# Altium PCB MB1280.PcbDoc
Units mil, origin at the board's own origin, x right, y up, seen from the top; angles counter-clockwise.
Board outline 2150 x 1780 mil, 2 copper layers (Top Layer, Bottom Layer), stack 61.855 mil thick; 26 components, 23 nets, 119 pads, 19 vias.
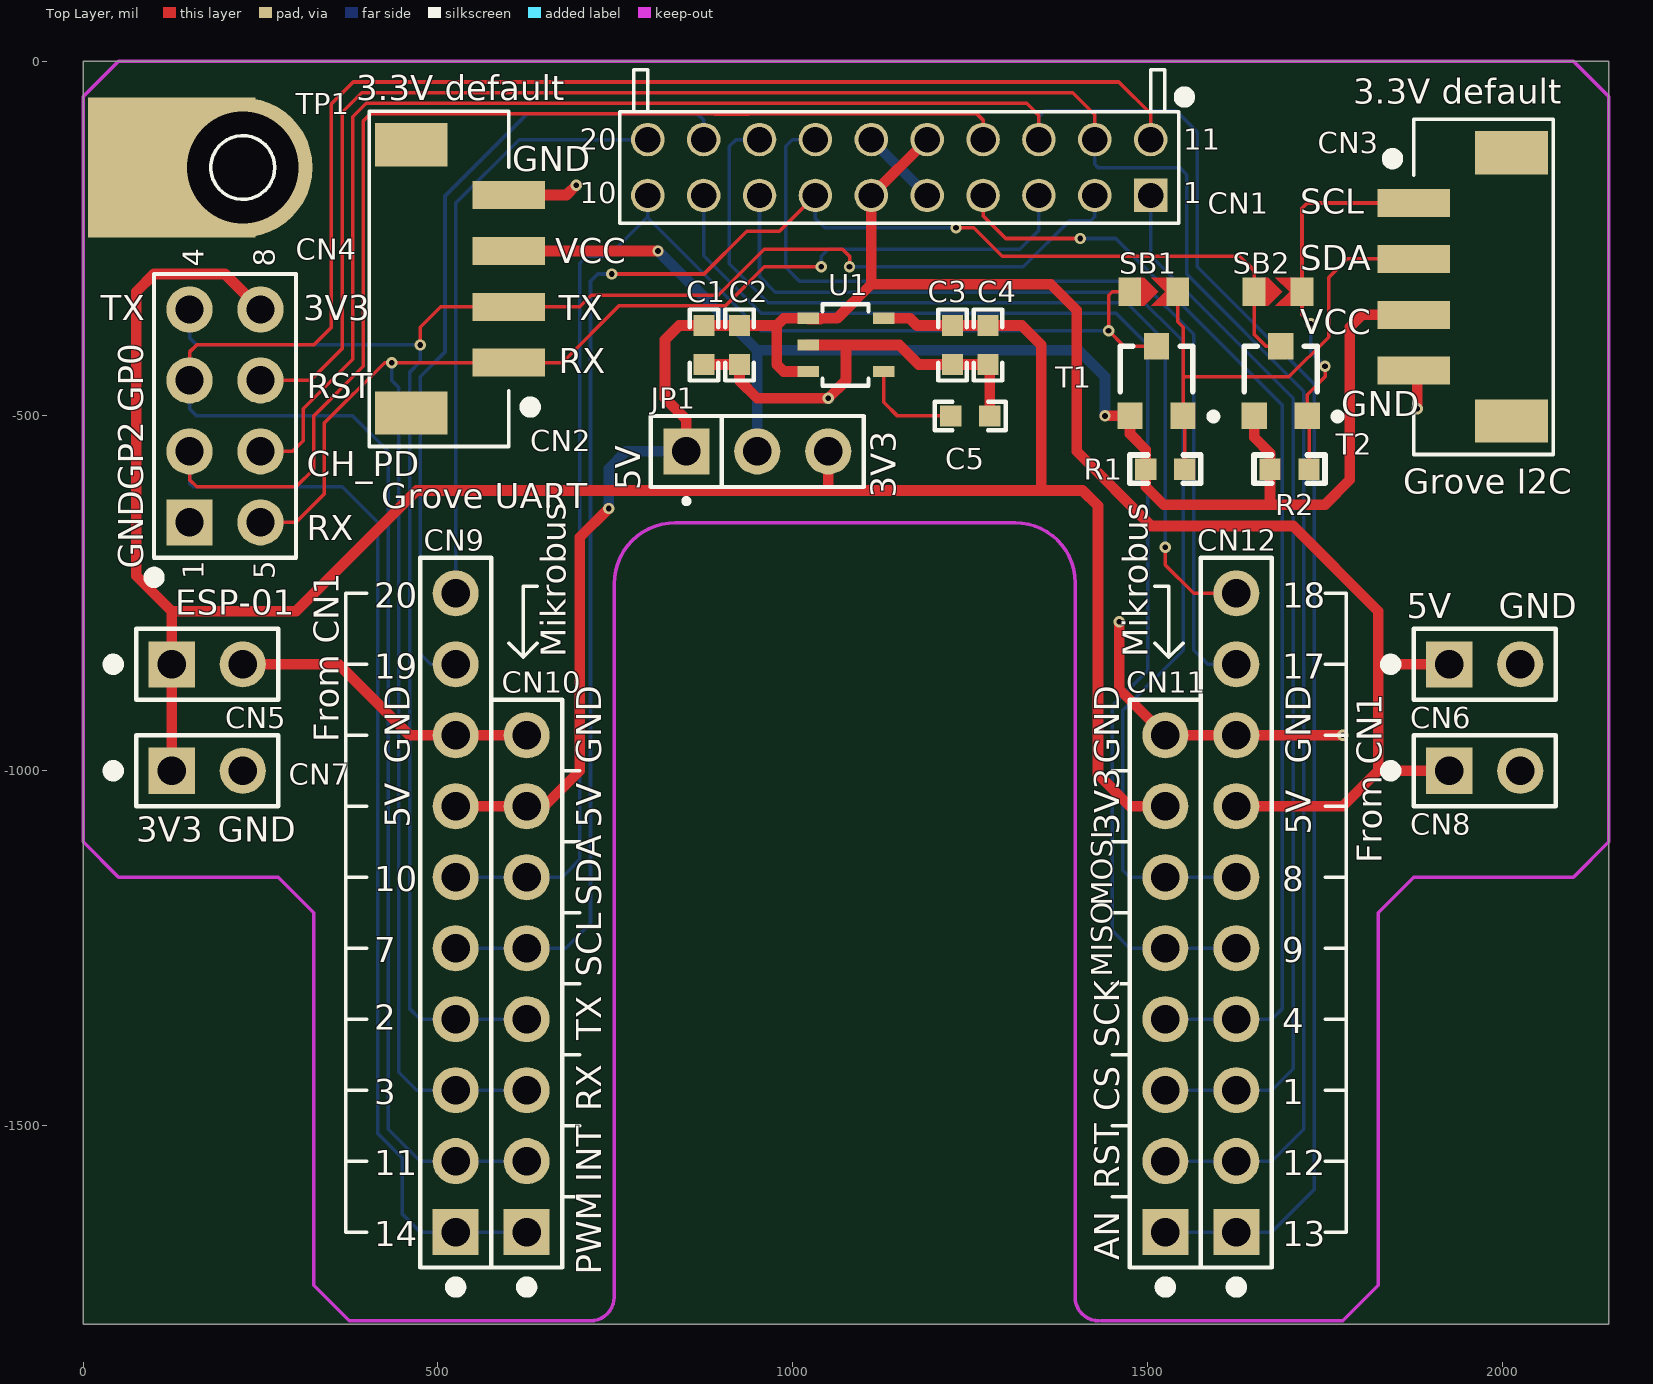
[diagram p0: Top Layer view]
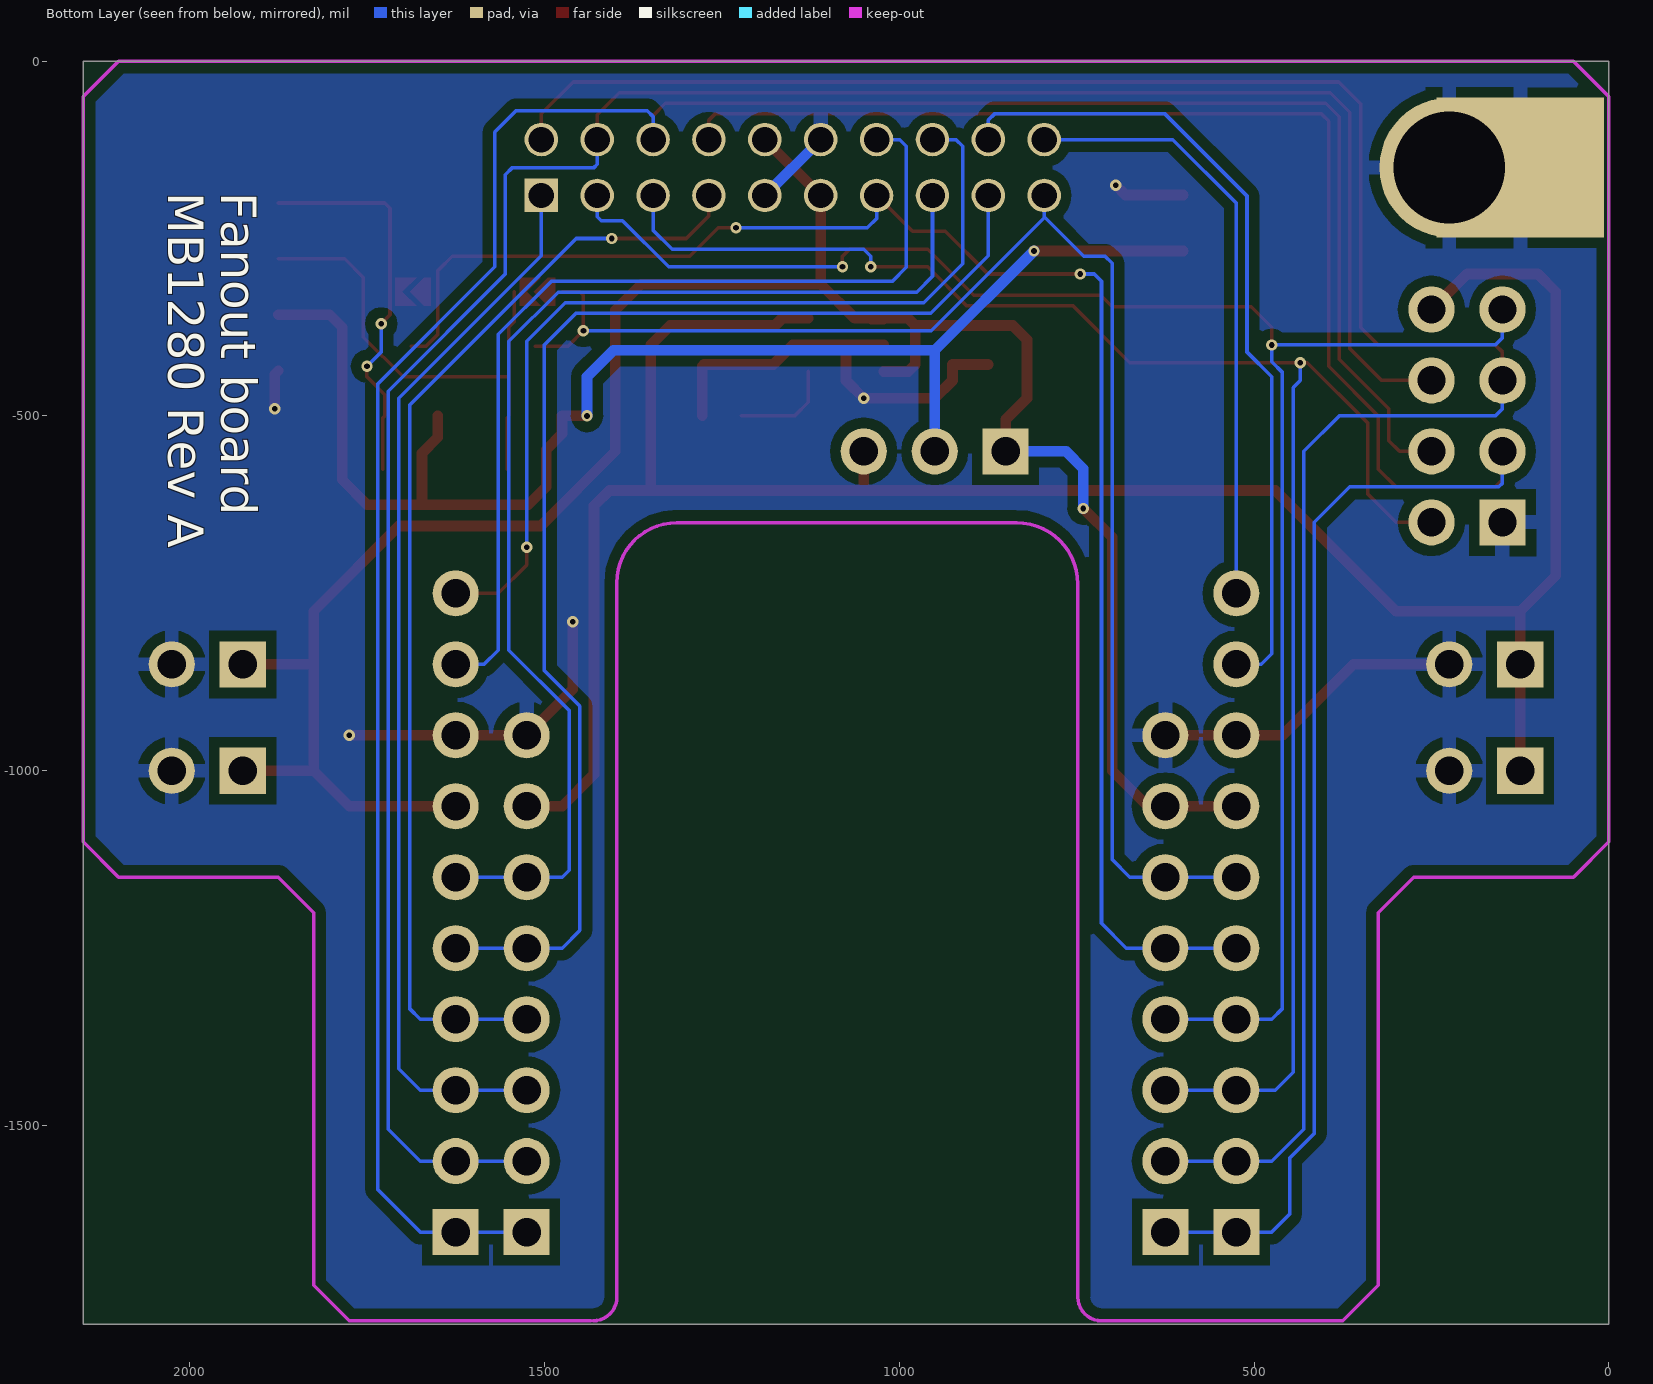
[diagram p1: Bottom Layer view, seen from below]

## Layer stack, top to bottom
Top Solder: solder mask 0.4, Solder Resist, Dk 3.5
Top Layer: signal copper 1.4
Dielectric1: core 59.0551, FR-4, Dk 4.8
Bottom Layer: signal copper 1.4
Bottom Solder: solder mask 0.4, Solder Resist, Dk 3.5

## Board outline
0,0 0,-1100 0,-1780 0,0 2150,0 2150,-1780 1290,-1780 0,-1780

## Design rules (kind name [scope] priority, off if disabled: settings)
Clearance Clearance_1 [(InPoly)] p1: gap=15 ignorepadtopadclearanceinfootprint=FALSE except(0: Arc-Hole Track-Hole SMDPad-Hole THPad-Hole Via-Hole Fill-Hole Poly-Hole Region-Hole Text-Hole)
Clearance Clearance_2 [(HasFootprint('SB_DIP')) or (HasFootprint('JP2_SMD')) or InNet('PC13')] p2: gap=5 ignorepadtopadclearanceinfootprint=FALSE except(0: Arc-Hole Track-Hole SMDPad-Hole THPad-Hole Via-Hole Fill-Hole Poly-Hole Region-Hole Text-Hole)
Clearance [All] p3: gap=10 ignorepadtopadclearanceinfootprint=FALSE except(0: Arc-Hole Track-Hole SMDPad-Hole THPad-Hole Via-Hole Fill-Hole Poly-Hole Region-Hole Text-Hole)
FabricationTestPointUsage TestPointUsage [All] p1: valid=0 allowmultiple=FALSE
FabricationTestpoint Testpoint [(IsPad And (OnTopLayer Or OnBottomLayer))] p1: side=3 testpointundercomponent=TRUE minsize=40 maxsize=100 preferedsize=60 minholesize=0 maxholesize=40 preferedholesize=32 testpointgrid=1 allowsidetop=TRUE allowsidebottom=TRUE usegrid=TRUE gridtolerance=0.01
HoleSize [All] p1: absolutevalues=TRUE maxlimit=150 minlimit=1 maxpercent=80.000 minpercent=20.000
PolygonConnect PolygonConnect_1 [IsVia] p1: connectstyle=Direct reliefconductorwidth=20 reliefentries=4 polygonreliefangle="90 Angle" airgapwidth=10
PolygonConnect [All] p2: connectstyle=Relief reliefconductorwidth=20 reliefentries=4 polygonreliefangle="90 Angle" airgapwidth=10
RoomDefinition MB1280_Fanout [InComponentClass('MB1280_Fanout')] p1: confinementstyle=ConfineIn formatcopy=TRUE lockcomponents=FALSE outline -2758.27,-3753.15 -758.27,-3753.15 -758.27,-2753.15 -2758.27,-2753.15
RoutingLayers [All] p1: top layer_v5=FALSE bottom layer_v5=FALSE
RoutingVias [All] p1: holewidth=13 width=25 viastyle="Through Hole" minholewidth=8 minwidth=16 maxholewidth=28 maxwidth=50
SilkToSolderMaskClearance SilkscreenOverComponentPads [IsPad] p1: minsilkscreentomaskgap=10 clearancetoexposedcopper=TRUE
SolderMaskExpansion [All] p1: expansion=4
Width Width_1 [InNet('VDD_MCU')] p1: maxlimit=100 minlimit=6 preferedwidth=12
Width [All] p2: maxlimit=100 minlimit=5 preferedwidth=5 minimp=50.000000 maximp=50.000000 favimp=50.000000
25 further rules are at their usual default settings.

## Components (designator, comment, footprint, x,y, rotation, side; value= is the part's Value field where it differs from the comment)
C1 "100nF" 0603C 875,-400 r270 top
C2 "1uF_X5R_0603" 0603C 925,-400 r270 top value=1µF
C3 "1uF_X5R_0603" 0603C 1225,-400 r90 top value=1µF
C4 "100nF" 0603C 1275,-400 r270 top
C5 "10nF_X7R_0603" 0603C 1250,-500 r0 top value=10NF
CN1 "TMM-110-01-L-D-RA" 2*10_MALE_2MM_H 1150,-150 r0 top
CN2 "1125S-SMT-4P" 1X4_MALE_C 600,-425 r270 top
CN3 "1125S-SMT-4P" 1X4_MALE_C 1875,-200 r90 top
CN4 "Header 4X2A" HDR2X4_CEN1 150,-650 r90 top
CN5 "PAD 2" HDR_2X1_2R54 125,-850 r0 top
CN6 "PAD 2" HDR_2X1_2R54 1925,-850 r0 top
CN7 "PAD 2" HDR_2X1_2R54 125,-1000 r0 top
CN8 "PAD 2" HDR_2X1_2R54 1925,-1000 r0 top
CN9 "PAD 1X8" 1*10P_FEMALE 525,-1650 r90 top
CN10 "Header 8X1_Female" 1*8P_FEMALE 625,-1650 r90 top
CN11 "Header 8X1_Female" 1*8P_FEMALE 1525,-1650 r90 top
CN12 "PAD 1X8" 1*10P_FEMALE 1625,-1650 r90 top
JP1 "" SIP3 850,-550 r0 top
R1 "4K7[N/A]" 0603R 1525,-575 r0 top value=1K
R2 "4K7[N/A]" 0603R 1700,-575 r0 top value=1K
SB1 "Closed" SB_0603 1475,-325 r180 top
SB2 "Closed" SB_0603 1650,-325 r180 top
T1 "BSN20[N/A]" SOT23-213 1550,-500 r0 top
T2 "BSN20[N/A]" SOT23-213 1725,-500 r0 top
TP1 "Ground" TP_C4MM_PAD 225,-150 r0 top
U1 "LDK120M33R" SOT-23-5L 1075,-400 r0 top

## Footprints (in the part's own frame and the unit in brackets; to place one, negate y for a bottom-side part, rotate by r counter-clockwise, add the part's x,y. Pads: shape width x height; smd on the part's side, far side on the other; paste and mask are expansions set on the pad)
1*8P_FEMALE [mil]
  rect 65x65 hole 40: 1(0,0)
  round 65 hole 40: 2(100,0) 3(200,0) 4(300,0) 5(400,0) 6(500,0) 7(600,0) 8(700,0)
  silkscreen extent -85,-50 750,50
1*10P_FEMALE [mil]
  rect 65x65 hole 40: 1(0,0)
  round 65 hole 40: 2(100,0) 3(200,0) 4(300,0) 5(400,0) 6(500,0) 7(600,0) 8(700,0) 9(800,0) 10(900,0)
  silkscreen extent -85,-50 950,50
1X4_MALE_C [mm] "Connector; Header; 4 Position"
  rect 1.55x2.6 smd: 0(-7.8,-3.5) 0(1.8,-3.5)
  rect 1x2.6 smd: 1(0,0) 2(-2,0) 3(-4,0) 4(-6,0)
  silkscreen extent -9,-5 3,0.95
2*10_MALE_2MM_H [mm]
  rect 1.2x1.2 hole 0.91: 1(9,-1)
  round 1.2 hole 0.91: 2(7,-1) 3(5,-1) 4(3,-1) 5(1,-1) 6(-1,-1) 7(-3,-1) 8(-5,-1) 9(-7,-1) 10(-9,-1) 11(9,1) 12(7,1) 13(5,1) 14(3,1) 15(1,1) 16(-1,1) 17(-3,1) 18(-5,1) 19(-7,1) 20(-9,1)
  silkscreen extent -10,-2 10.4,3.5
0603C [mil]
  rect 30x30 smd: 1(27.5,0) 2(-27.5,0)
  silkscreen extent -50,-20 50,20
0603R [mil]
  rect 30x30 smd: 1(27.5,0) 2(-27.5,0)
  silkscreen extent -50,-20 50,20
HDR2X4_CEN1 [mil] "Connector; Header; 4x2 Position"
  rect 65x65 hole 40: 1(0,0)
  round 65 hole 40: 2(100,0) 3(200,0) 4(300,0) 5(0,-100) 6(100,-100) 7(200,-100) 8(300,-100)
  silkscreen extent -85,-150 350,57
HDR_2X1_2R54 [mil]
  rect 65x65 hole 40: 1(0,0)
  round 65 hole 40: 2(100,0)
  silkscreen extent -90,-50 150,50
SB_0603 [mil]
  rect 32x40 smd: 1(0,0) 2(-67.5,0)
  Top Layer region: -10,20 -20,20 -40,0 -20,-20 -10,-20
  Top Layer region: -60,0 -50,0 -30,20 -60,20
  Top Layer region: -60,0 -50,0 -30,-20 -60,-20
SIP3 [mil]
  rect 65x65 hole 40: 1(0,0)
  round 65 hole 40: 2(100,0) 3(200,0)
  silkscreen extent -50,-72 250,50
SOT23-213 [mm]
  rect 0.9x0.95 smd: 1(0,0) 2(-1.9,0) 3(-0.95,2.5)
  silkscreen extent -2.25,-0.14 1.21,2.5
SOT-23-5L [mil]
  rect 30x16 smd: 1(-53.15,37.4) 2(-53.15,0) 3(-53.15,-37.4) 4(53.15,-37.4) 5(53.15,37.4)
  silkscreen extent -33,-58 32,57
TP_C4MM_PAD [mm]
  rect 6x5 smd: 1(-2.54,0)
  rect 6x5 smd far side: 1(-2.54,0)
  round 5 hole 4: 1(0,0)
  silkscreen extent -1.14,-1.14 1.14,1.14

## Part data
C1 C4: library part Capacitor_ST, "Capacitor 0402 / 0603 / 0805", Revision="July-2002: Re-released for DXP Platform."
C2 C3: library part "CAP SMD 0603  X5R 1µF 25V 10%", "0603  X5R 1µF", Rated voltage=25V, Temperature Max=+125°C, Temperature Min=-55°C, Tolerance=10%, Order code Farnell=1288202RL, Technology=X5R
C5: library part "CAP SMD 0603  X7R 10000PF 50V 10%", "0603  X7R 10NF", Rated voltage=50V, Temperature Max=+125°C, Temperature Min=-55°C, Tolerance=10%, Order code Farnell=7569548RL, Order code RS=2040779, Technology=X7R
CN1: library part "Header 10X2A", "Header, 10-Pin, Dual row", LatestRevisionDate=17-Jul-2002, LatestRevisionNote="Re-released for DXP Platform.", Publisher="Altium Limited"
CN2 CN3: library part "Header 4", LatestRevisionDate=17-Jul-2002, LatestRevisionNote="Re-released for DXP Platform.", Publisher="Altium Limited"
CN4: "Header, 4-Pin, Dual row", LatestRevisionDate=17-Jul-2002, LatestRevisionNote="Re-released for DXP Platform.", Publisher="Altium Limited"
CN5 CN6 CN7 CN8: library part "Header 2", "Header, 2-Pin", LatestRevisionDate=17-Jul-2002, LatestRevisionNote="Re-released for DXP Platform.", Publisher="Altium Limited"
CN9 CN12: library part "Header 10X1_Female", "Header, 10-Pin, Single row,female", ECCN_US/EU=NA, LatestRevisionDate=17-Jul-2002, LatestRevisionNote="Re-released for DXP Platform.", Ordered by=Subcon, Publisher="Altium Limited"
CN10 CN11: "Header, 8-Pin, Single row,female", ECCN_US/EU=NA, LatestRevisionDate=17-Jul-2002, LatestRevisionNote="Re-released for DXP Platform.", Ordered by=Subcon, Publisher="Altium Limited"
JP1: library part Jumper3
R1 R2: library part res1, "Resistor", Published=8-Jun-2000, Publisher="Altium Limited", Revision="July-2002: Re-released for DXP Platform."
SB1 SB2: library part "Circuit Breaker", "Circuit Breaker", Comments="Solder bridge", ECCN_US/EU=NA, Ordered by=Subcon, Published=24-Mar-1999, Publisher="Altium Limited", Revision="July-2002: Re-released for DXP Platform."
T1 T2: library part 2N7000
TP1: library part TP
U1: "200 mA low quiescent current very low noise LDO", Manuf_1=STM, Distrib=ST, ECCN_US/EU=EAR99/NEC, Manuf_Part_1=LDK120M33R, Order=LDK120M33R, Provided=ST, Ref St=9176161

## Via types
v1: diameter 16, hole 8, Top Layer to Bottom Layer, tented both sides, 19 vias

## Nets (pads, with @x,y where several pads share a name; then routed paths per layer and width w, separated by ;. In a path a pad name is that pad's centre, name@x,y a point inside that pad or via, vN(x,y) a via of type N, cw(c..) or ccw(c..) an arc to the next point about the centre after c; other vN are vias at no path point)
+3V3: C3.1 C4.2 CN4.8 CN5.1 CN7.1 CN11.7 JP1.3 U1.5 | length 3275.5
  Top Layer w15: CN7.1 CN5.1 125,-775 ; CN4.8 200,-300 100,-300 75,-325 75,-725 125,-775 ; JP1.3 1050,-605 ; U1.5 1165.1,-362.6 1175,-372.5 C3.1 C4.2 1322.5,-372.5 1350,-400 1350,-605 ; CN11.7 1475,-1050 1430,-1005 1430,-626.72 1408.28,-605 1350,-605 ; 125,-775 300,-775 470,-605 1050,-605 ; 1050,-605 1350,-605
+5V: C1.2 C2.2 CN1.6 CN1.15 CN6.1 CN8.1 CN9.7 CN10.7 CN12.7 JP1.1 U1.1 U1.3 | length 3257.3
  Top Layer w15: CN9.7 CN10.7 650,-1050 700,-1000 700,-700 700,-671.01 v1(740.51,-630.5) ; JP1.1 850,-505 820,-475 820,-392.5 840,-372.5 C1.2 C2.2 977.5,-372.5 ; U1.3 987.4,-437.4 977.5,-427.5 977.5,-372.5 ; U1.1 987.4,-362.6 977.5,-372.5 ; U1.1@1022.66,-363.41 1038.64,-363.41 1039.45,-362.6 1062.4,-362.6 1110.63,-314.37 ; CN1.15 CN1.6 1110.63,-314.37 ; CN12.7 1775,-1050 1825,-1000 ; CN8.1 1825,-1000 ; CN6.1 1825,-850 ; 1110.63,-314.37 1363.31,-314.37 1400,-351.06 1400,-550 1505,-655 1705,-655 1825,-775 1825,-850 ; 1825,-1000 1825,-850
  Bottom Layer w15: v1(740.51,-630.5) 740.51,-574.49 765,-550 821.01,-550 JP1.1
GND: C1.1 C2.1 C3.2 C4.1 C5.1 CN1.5 CN1.16 CN2.4 CN3.4 CN4.1 CN5.2 CN6.2 CN7.2 CN8.2 CN9.8 CN10.8 CN11.8 CN12.8 TP1.1 U1.2 | length 1777.5
  Top Layer w15: CN5.2 360,-850 460,-950 CN9.8 CN10.8 ; CN2.4 681.22,-188.78 v1(695,-175) ; C1.1 C2.1 925,-450 950,-475 v1(1050,-475) 1075,-450 1075,-400 ; U1.2 1075,-400 ; C5.1 1277.5,-430 C4.1 C3.2 1177.5,-427.5 1150,-400 1075,-400 ; v1(1460,-790) 1460,-885 CN11.8 CN12.8 v1(1775,-950) ; CN3.4 1880,-441.22 v1(1880,-490)
  Bottom Layer w15: CN1.16 CN1.5
I2C_SCL: CN3.1 R2.1 SB2.2 T2.1 | length 553
  Top Layer w5: R2.1 1727.5,-502.5 T2.1 1725,-470 1750,-445 v1(1750,-430) ; v1(1730,-370) 1717.5,-357.5 SB2.2 1717.5,-207.5 1725,-200 CN3.1
  Bottom Layer w5: v1(1730,-370) 1730,-410 v1(1750,-430)
I2C_SDA: CN3.2 R1.1 SB1.2 T1.1 | length 697.2
  Top Layer w5: SB1.2 1542.5,-367.5 1550,-375 1550,-445 ; R1.1 1552.5,-502.5 T1.1 1550,-445 ; CN3.2 1781.26,-278.74 1755,-305 1755,-388.94 1698.94,-445 1550,-445
NetC5_2: C5.2 U1.4 | length 145.6
  Top Layer w5: U1.4 1128.15,-480.65 1147.5,-500 C5.2
STMOD#1: CN1.1 CN11.3 CN12.3 | length 1506.2
  Bottom Layer w5: CN1.1 1504.33,-274.33 1705,-475 1705,-1420 1675,-1450 CN12.3 CN11.3
STMOD#2: CN1.2 CN2.2 CN4.4 CN9.4 CN10.4 | length 2581.1
  Top Layer w5: v1(475,-400) 475,-375 503.74,-346.26 CN2.2 700,-346.26 716.26,-330 895,-330 960,-265 1070,-265 1080,-275 v1(1080,-290)
  Bottom Layer w5: CN4.4 150,-390 160,-400 v1(475,-400) 475,-423.79 460,-438.79 460,-1335 475,-1350 CN9.4 CN10.4 ; v1(1080,-290) 1324.96,-290 1389.96,-225 1420,-225 1425.59,-219.41 CN1.2
STMOD#3: CN1.3 CN2.1 CN4.5 CN9.3 CN10.3 | length 2578.1
  Top Layer w5: CN4.5 300,-650 340,-610 340,-510 425,-425 v1(435,-425) CN2.1 675,-425 755,-345 905,-345 960,-290 v1(1040,-290)
  Bottom Layer w5: v1(435,-425) 435,-450 445,-460 445,-1425 470,-1450 CN9.3 CN10.3 ; v1(1040,-290) 1040,-275 1050,-265 1320,-265 1346.85,-238.15 CN1.3
STMOD#4: CN1.4 CN11.4 CN12.4 | length 1582.4
  Top Layer w5: CN1.4 1268.11,-218.11 1300,-250 v1(1405,-250)
  Bottom Layer w5: v1(1405,-250) 1455,-250 1690,-485 1690,-1335 1675,-1350 CN12.4 CN11.4
STMOD#7: CN1.7 CN9.5 CN10.5 SB2.1 T2.3 | length 2291.7
  Top Layer w5: v1(745,-300) 875,-300 935,-240 981.26,-240 CN1.7 ; v1(1230,-235) 1255,-235 1295,-275 1630,-275 1650,-295 SB2.1 1650,-385 1666.58,-401.58 T2.3
  Bottom Layer w5: CN9.5 CN10.5 680,-1250 715,-1215 715,-310 725,-300 v1(745,-300) ; CN1.7 1031.89,-221.89 1045,-235 v1(1230,-235)
STMOD#8: CN1.8 CN11.6 CN12.6 | length 1693
  Bottom Layer w5: CN1.8 953.15,-303.15 975.5,-325.5 1480.5,-325.5 1550,-395 1550,-830 1465,-915 1465,-1140 1475,-1150 CN11.6 CN12.6
STMOD#9: CN1.9 CN11.5 CN12.5 | length 1793.7
  Bottom Layer w5: CN1.9 874.41,-274.41 955.5,-355.5 1455.5,-355.5 1500,-400 1500,-858.79 1450,-908.79 1450,-1225 1475,-1250 CN11.5 CN12.5
STMOD#10: CN1.10 CN9.6 CN10.6 SB1.1 T1.3 | length 2052.9
  Top Layer w5: SB1.1 1450,-325 1445,-330 v1(1445,-380) 1466.58,-401.58 T1.3
  Bottom Layer w5: CN9.6 CN10.6 675,-1150 700,-1125 700,-285.04 710.04,-275 740,-275 794.33,-220.67 795.67,-220.67 ; CN1.10 795.67,-220.67 ; v1(1445,-380) 955,-380 795.67,-220.67
STMOD#11: CN1.11 CN4.3 CN9.2 CN10.2 | length 3304.8
  Top Layer w5: CN4.3 150,-410 160,-400 325,-400 350,-375 350,-60 380.49,-29.51 1459.51,-29.51 1504.33,-74.33 CN1.11
  Bottom Layer w5: CN4.3 150,-490 160,-500 380,-500 430,-550 430,-1505 475,-1550 CN9.2 CN10.2
STMOD#12: CN1.12 CN4.7 CN11.2 CN12.2 | length 3383.8
  Top Layer w5: CN4.7 320,-450 365,-405 365,-72.08 392.57,-44.51 1394.51,-44.51 1425.59,-75.59 CN1.12
  Bottom Layer w5: CN1.12 1425.59,-145.59 1430,-150 1545,-150 1555,-160 1555,-300 1720,-465 1720,-1505 1675,-1550 CN12.2 CN11.2
STMOD#13: CN1.13 CN4.6 CN11.1 CN12.1 | length 3632.1
  Top Layer w5: CN4.6 295,-550 310,-535 310,-490 380,-420 380,-78.29 398.79,-59.51 1329.51,-59.51 1346.85,-76.85 CN1.13
  Bottom Layer w5: CN1.13 1346.85,-78.15 1355,-70 1540,-70 1570,-100 1570,-290 1735,-455 1735,-1590 1675,-1650 CN12.1 CN11.1
STMOD#14: CN1.14 CN4.2 CN9.1 CN10.1 | length 3165.4
  Top Layer w5: CN4.2 150,-590 160,-600 300,-600 325,-575 325,-500 395,-430 395,-84.51 405,-74.51 889.37,-74.51 889.86,-75 937.7,-75 938.19,-74.51 1259.51,-74.51 1268.11,-83.11 CN1.14
  Bottom Layer w5: CN4.2 150,-595 155,-600 365,-600 415,-650 415,-1511.21 450,-1546.21 450,-1625 475,-1650 CN9.1 CN10.1
STMOD#17: CN1.17 CN12.9 | length 1343.7
  Bottom Layer w5: CN1.17 999.37,-110.63 990,-120 990,-290.5 1010,-310.5 1490.5,-310.5 1565,-385 1565,-830 1585,-850 CN12.9
STMOD#18: CN1.18 CN12.10 | length 1303.4
  Top Layer w5: v1(1525,-685) 1525,-710 1565,-750 CN12.10
  Bottom Layer w5: CN1.18 919.9,-110.63 910.53,-120 910.53,-285.53 965.5,-340.5 1470.5,-340.5 1525,-395 v1(1525,-685)
STMOD#19: CN1.19 CN9.9 | length 1159.1
  Bottom Layer w5: CN9.9 490,-850 475,-835 475,-445 510,-410 510,-190 625.49,-74.51 865.83,-74.51 874.41,-83.08 CN1.19
STMOD#20: CN1.20 CN9.10 | length 857.7
  Bottom Layer w5: CN9.10 525,-200 614.37,-110.63 CN1.20
VCC: CN2.3 CN3.3 JP1.2 R1.2 R2.2 T1.2 T2.2 | length 2011.8
  Top Layer w15: CN2.3 v1(810,-267.52) ; v1(1440,-500) T1.2 1475.2,-525.2 1497.5,-547.5 R1.2 1497.5,-600 1522.5,-625 1750,-625 1785,-590 1785,-375 1802.52,-357.48 CN3.3 ; T2.2 1650.2,-530.2 1672.5,-552.5 R2.2 1672.5,-622.5
  Bottom Layer w15: v1(810,-267.52) 950,-407.52 ; JP1.2 950,-407.52 ; v1(1440,-500) 1440,-445 1402.52,-407.52 950,-407.52
pads on no net: CN2.0 CN3.0

## Polygon pours and split planes (outlines as drawn)
GND on Bottom Layer "Bottom Layer-No Net" (solid, remove dead copper, pour order 4): 10,-10 10,-1785 1625,-1785 2230,-1785 2160,-1715 2160,-1085 2160,-10 15,-10

## Keep-outs
Keep-Out Layer:
  lines w5: 1431.25,-1775 cw(c1431.25,-1741.68) 1397.93,-1741.68 1397.93,-1280.32 1397.93,-734.98 ccw(c1313.34,-734.98) 1313.34,-650.39 834.72,-650.39 ccw(c834.72,-736.79) 748.32,-736.79 748.32,-1280.32 748.32,-1741.68 cw(c715,-1741.68) 715,-1775 375,-1775 325,-1725 325,-1200 275,-1150 50,-1150 0,-1100 0,-50 50,0 2100,0 2150,-50 2150,-1100 2100,-1150 1875,-1150 1825,-1200 1825,-1725 1775,-1775 1435,-1775

## Silkscreen, mask and mechanical layers (free items; w line width, h text height)
Top Overlay:
  lines w5: 370,-1550 400,-1550 ; 370,-1450 400,-1450 ; 370,-1350 400,-1350 ; 370,-1250 400,-1250 ; 370,-1150 400,-1150 ; 370,-1050 400,-1050 ; 370,-950 400,-950 ; 370,-850 400,-850 ; 400,-1650 370,-1650 370,-750 400,-750 ; 600,-820 620,-840 ; 640,-820 620,-840 ; 640,-740 620,-740 620,-840 ; 675,-1600 700,-1600 ; 675,-1500 700,-1500 ; 675,-1400 700,-1400 ; 675,-1300 700,-1300 ; 675,-1200 700,-1200 ; 675,-1100 700,-1100 ; 675,-1000 700,-1000 ; 1450,-1600 1475,-1600 ; 1450,-1500 1475,-1500 ; 1450,-1400 1475,-1400 ; 1450,-1300 1475,-1300 ; 1450,-1200 1475,-1200 ; 1450,-1100 1475,-1100 ; 1450,-1000 1475,-1000 ; 1510,-820 1530,-840 ; 1510,-740 1530,-740 1530,-840 ; 1550,-820 1530,-840 ; 1750,-1650 1780,-1650 1780,-750 1750,-750 ; 1750,-1550 1780,-1550 ; 1750,-1450 1780,-1450 ; 1750,-1350 1780,-1350 ; 1750,-1250 1780,-1250 ; 1750,-1150 1780,-1150 ; 1750,-1050 1780,-1050 ; 1750,-950 1780,-950 ; 1750,-850 1780,-850
  text "3.3V default" at 385,-55 h35
  text "3.3V default" at 1790,-60 h35
  text "GND" at 605,-155 h35
  text "SCL" at 1715,-215 h35
  text "VCC" at 665,-285 h35
  text "SDA" at 1715,-295 h35
  text "TX" at 25,-365 h35
  text "3V3" at 310,-365 h35
  text "TX" at 670,-365 h35
  text "VCC" at 1715,-385 h35
  text "RX" at 670,-440 h35
  text "RST" at 315,-475 h35
  text "GP0" at 85,-495 h35 r90
  text "GND" at 1772.6,-500.79 h35
  text "CH_PD" at 315,-585 h35
  text "GP2" at 85,-605 h35 r90
  text "5V" at 785,-605 h35 r90
  text "Grove I2C" at 1860,-610 h35
  text "3V3" at 1145,-615 h35 r90
  text "Grove UART" at 420,-630 h35
  text "RX" at 315,-675 h35
  text "GND" at 85,-715 h35 r90
  text "20" at 410,-770 h35
  text "18" at 1690,-770 h35
  text "ESP-01" at 130,-780 h35
  text "5V" at 1865,-785 h35
  text "GND" at 1995,-785 h35
  text "Mikrobus" at 680,-840 h35 r90
  text "Mikrobus" at 1500,-840 h35 r90
  text "19" at 410,-870 h35
  text "17" at 1690,-870 h35
  text "From CN1" at 360,-960 h35 r90
  text "GND" at 460,-990 h35 r90
  text "GND" at 730,-990 h35 r90
  text "GND" at 1460,-990 h35 r90
  text "GND" at 1730,-990 h35 r90
  text "5V" at 460,-1080 h35 r90
  text "5V" at 730,-1080 h35 r90
  text "3V3" at 1460,-1090 h35 r90
  text "5V" at 1730,-1090 h35 r90
  text "3V3" at 75,-1100 h35
  text "GND" at 190,-1100 h35
  text "From CN1" at 1830,-1130 h35 r90
  text "10" at 410,-1170 h35
  text "8" at 1690,-1170 h35
  text "SDA" at 730,-1190 h35 r90
  text "MOSI" at 1450,-1190 h30 r90
  text "7" at 410,-1270 h35
  text "9" at 1690,-1270 h35
  text "SCL" at 730,-1290 h35 r90
  text "MISO" at 1450,-1290 h30 r90
  text "2" at 410,-1365 h35
  text "4" at 1690,-1370 h35
  text "TX" at 730,-1380 h35 r90
  text "SCK" at 1460,-1390 h35 r90
  text "3" at 410,-1470 h35
  text "1" at 1690,-1470 h35
  text "RX" at 730,-1480 h35 r90
  text "CS" at 1460,-1480 h35 r90
  text "11" at 410,-1570 h35
  text "12" at 1690,-1570 h35
  text "INT" at 730,-1580 h35 r90
  text "RST" at 1460,-1590 h35 r90
  text "14" at 410,-1670 h35
  text "13" at 1690,-1670 h35
  text "AN" at 1460,-1690 h35 r90
  text "PWM" at 730,-1710 h35 r90
Bottom Overlay:
  text "Fanout board" at 1955,-185 h50 r90
  text "MB1280 Rev A" at 2030,-185 h50 r90
Mechanical 1:
  lines w5: 749.41,-1280.32 749.41,-1741.68 cw(c716.09,-1741.68) 716.09,-1775 375,-1775 325,-1725 325,-1200 275,-1150 50,-1150 0,-1100 0,-50 50,0 2100,0 2150,-50 2150,-1100 2100,-1150 1875,-1150 1825,-1200 1825,-1725 1775,-1775 1432.34,-1775 cw(c1432.34,-1741.68) 1399.02,-1741.68 1399.02,-1280.32 ; 749.41,-1278.94 cw(c769.09,-1278.94) 788.78,-1278.94 ; 788.78,-1280.32 788.78,-1741.68 ccw(c822.1,-1741.68) 822.1,-1775 1326.32,-1775 ccw(c1326.32,-1741.68) 1359.65,-1741.68 1359.65,-1280.32 ; 1359.65,-1278.94 cw(c1379.33,-1278.94) 1399.02,-1278.94 ; 749.41,-1150.39 ccw(c769.09,-1150.39) 788.78,-1150.39 788.78,-728.74 cw(c835.63,-728.74) 835.63,-681.89 1312.8,-681.89 cw(c1312.8,-728.74) 1359.65,-728.74 1359.65,-1150.39 ccw(c1379.33,-1150.39) 1399.02,-1150.39 1399.02,-734.98 ccw(c1314.43,-734.98) 1314.43,-650.39 835.8,-650.39 ccw(c835.8,-736.79) 749.41,-736.79 749.41,-1150.39
  text "MB1280" at 120,145 h60
Drill Drawing:
  lines w1: 2455,-1482.83 2875,-1482.83 ; 2455,-1469.53 2875,-1469.53 ; 2395,-1546 ccw(c2399,-1546) 2399,-1550 2931,-1550 ccw(c2931,-1546) 2935,-1546 2935,-1454 ccw(c2931,-1454) 2931,-1450 2399,-1450 ccw(c2399,-1454) 2395,-1454 2395,-1546
  text ".legend" at 2475,-360 h40
  text "Layer Stack Up Detail for: MB1280.PcbDoc" at 2455,-1464.87 h7
  text "Layer" at 2455,-1474.53 h3
  text "Gerber" at 2542.98,-1474.53 h3
  text "Copper" at 2594.57,-1474.53 h3
  text "Dielectric" at 2651.06,-1474.53 h3
  text "Dielectric" at 2709.64,-1474.53 h3
  text "Dielectric" at 2777.63,-1474.53 h3
  text "Dielectric" at 2836.22,-1474.53 h3
  text "Name" at 2455,-1480.53 h3
  text "Document" at 2542.98,-1480.53 h3
  text "Thickness" at 2594.57,-1480.53 h3
  text "Height" at 2651.06,-1480.53 h3
  text "Material" at 2709.64,-1480.53 h3
  text "Constant" at 2777.63,-1480.53 h3
  text "Type" at 2836.22,-1480.53 h3
  text "Top Solder Mask" at 2455,-1489.58 h4
  text "(.GTS)" at 2542.98,-1489.58 h4
  text "0.4mil" at 2651.06,-1489.58 h4
  text "Solder Resist" at 2709.64,-1489.58 h4
  text "3.50" at 2777.63,-1489.58 h4
  text "Top Layer" at 2455,-1502.08 h4
  text "(.GTL)" at 2542.98,-1502.08 h4
  text "1.4mil" at 2594.57,-1502.08 h4
  text "59.055mil" at 2651.06,-1508.33 h4
  text "FR-4" at 2709.64,-1508.33 h4
  text "4.80" at 2777.63,-1508.33 h4
  text "Core" at 2836.22,-1508.33 h4
  text "Bottom Layer" at 2455,-1514.58 h4
  text "(.GBL)" at 2542.98,-1514.58 h4
  text "1.4mil" at 2594.57,-1514.58 h4
  text "Bottom Solder Mask" at 2455,-1527.08 h4
  text "(.GBS)" at 2542.98,-1527.08 h4
  text "0.4mil" at 2651.06,-1527.08 h4
  text "Solder Resist" at 2709.64,-1527.08 h4
  text "3.50" at 2777.63,-1527.08 h4

## Dimensions
749.41,-1741.68 to 1399.02,-1741.68 on Drill Drawing
325,-1725 to 1825,-1725 on Drill Drawing
2100,0 to 1775,-1775 on Drill Drawing
0,-50 to 2150,-50 on Drill Drawing

## Text inside footprints (layer, text, board x,y; h text height)
CN1: Top Overlay "11" at 1550,-125 h30; Top Overlay "1" at 1550,-200 h30; Top Overlay "20" at 700,-125 h30; Top Overlay "10" at 700,-200 h30
CN4: Top Overlay "5" at 270,-730 h30 r90; Top Overlay "1" at 170,-730 h30 r90; Top Overlay "4" at 170,-290 h30 r90; Top Overlay "8" at 270,-290 h30 r90